# EAGLE board TSOC_PSoC4L (EAGLE 6.6.0)
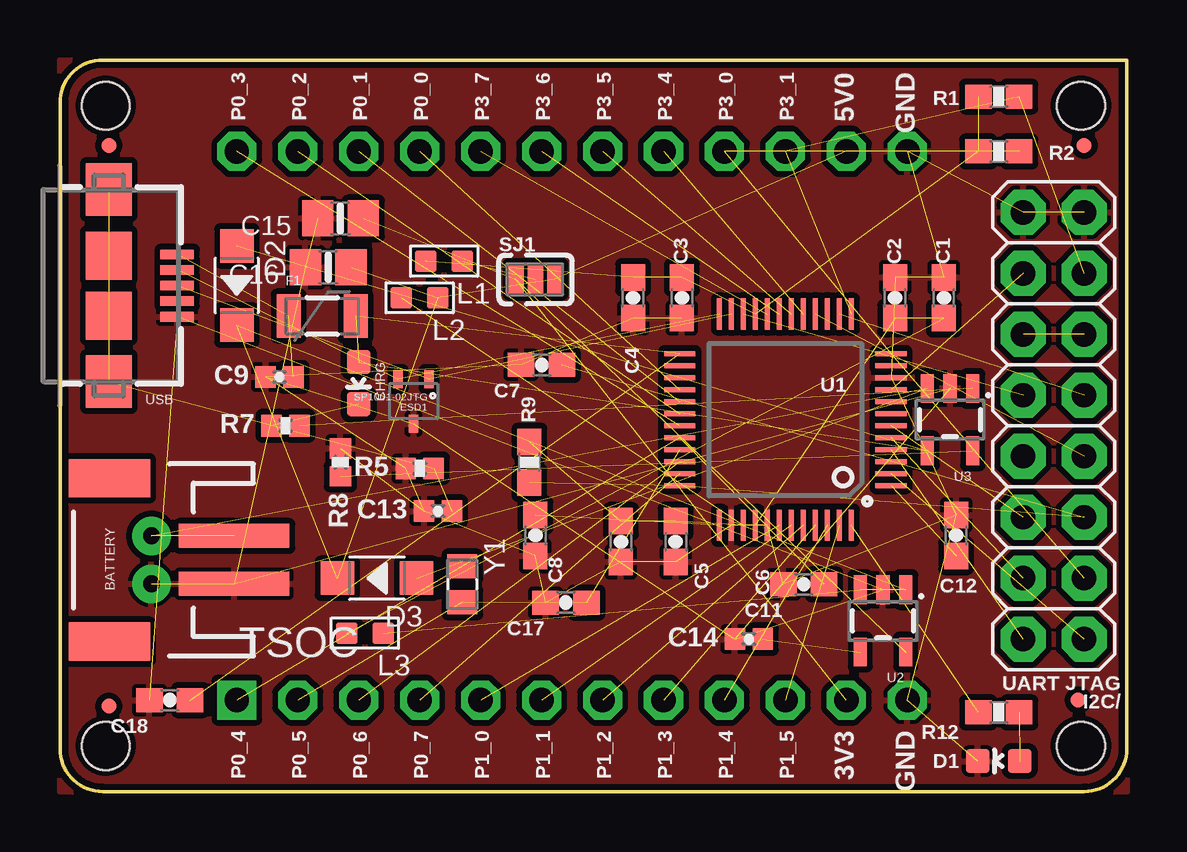
[diagram p0: board, top side]
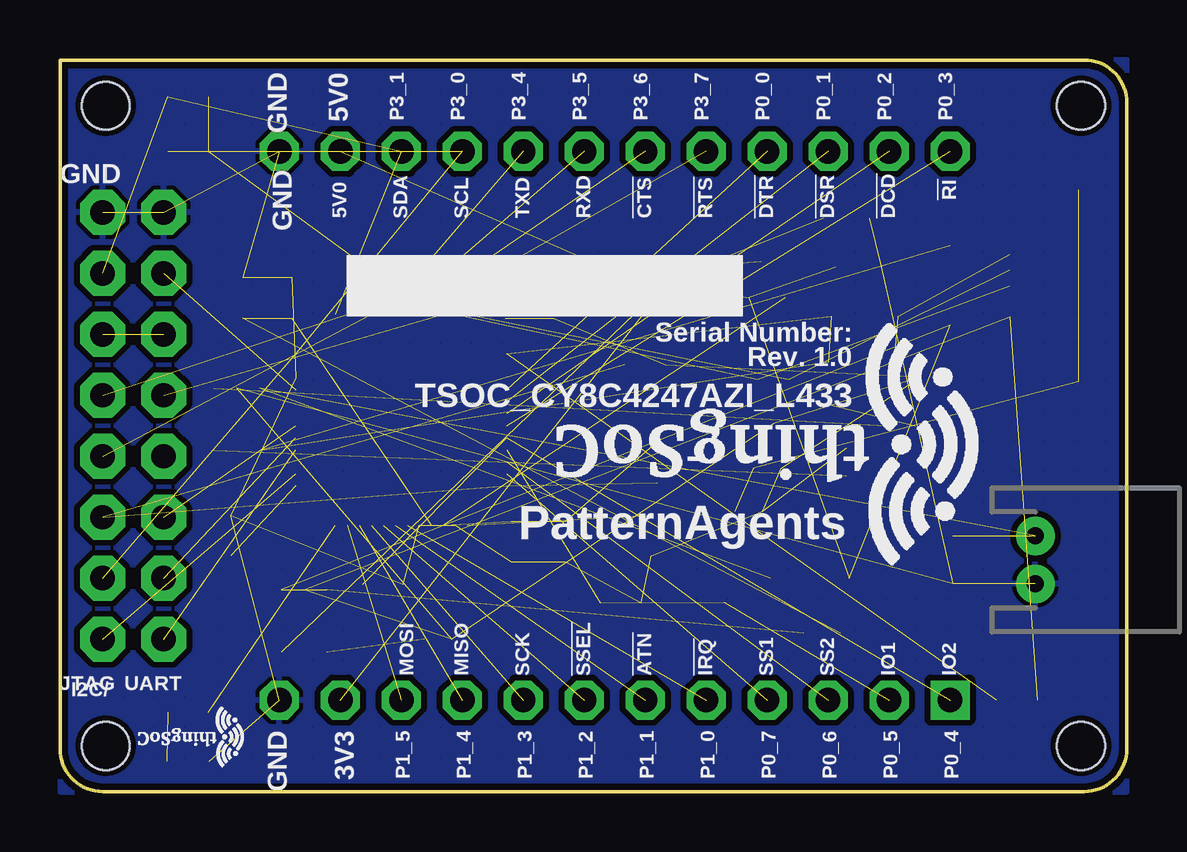
[diagram p1: board, bottom side, seen from below]

Size 44.45 x 30.48 mm. Coordinates in mm from the lower left corner, seen from the top.
Copper layers (1*16): Top 0.035mm / dielectric 1.5mm / Bottom 0.035mm
Design rules "PatternAgents_7mil": minimum track width 7mil, minimum drill 14mil, track to track 7mil, track to pad 7mil, pad to pad 7mil, via to via 7mil, smd to smd 7mil, copper to edge 7mil, drill to drill 7mil, minimum pad ring 12mil, minimum via ring 10mil, stop-mask expansion 4mil, vias tented up to drill 25mil, thermal gap 7mil
Net classes: 1 vcc: width 0.254 mm

## Footprints (pad centres in the part's own frame; a part is rotated, then mirrored left to right if it is on the bottom)
JST-2-SMD = smd 1 x 4.6: 1 -1,-3.7; 2 1,-3.7 | smd 1.6 x 3.4: NC1 -3.4,1.5; NC2 3.4,1.5
0603-CAP = smd 1.1 x 1: 1 -0.85,0; 2 0.85,0
0402-CAP = smd 0.85 x 0.9: 1 -0.58,0; 2 0.58,0
0805-NO = smd 1.3 x 1.5: 1 -0.95,0; 2 0.95,0
LED-0603 = smd 1 x 1: A 0,-0.877; C 0,0.877
SOD-123 = smd 1.397 x 1.397: + -1.651,0; - 1.651,0
SC70-3 = smd 0.4 x 0.75: 1 -0.65,-0.925; 2 0.65,-0.925; 3 0,0.925
PTC-1206 = smd 1 x 1.8: 1 -1.4,0; 2 1.4,0
MICRO-FIDUCIAL = smd 0.635 x 0.635: 1 0,0
2X8 = drill 1.016 pad 1.88 octagon: 1 0,0; 2 0,2.54; 3 2.54,0; 4 2.54,2.54; 5 5.08,0; 6 5.08,2.54; 7 7.62,0; 8 7.62,2.54; 9 10.16,0; 10 10.16,2.54; 11 12.7,0; 12 12.7,2.54; 13 15.24,0; 14 15.24,2.54; 15 17.78,0; 16 17.78,2.54
JST-2-PTH-NS = drill 0.7 pad 1.6: 1 -1,0; 2 1,0
L0603 = smd 0.889 x 0.889: 1 -0.762,0; 2 0.762,0
0603-RES = smd 1.1 x 1: 1 -0.85,0; 2 0.85,0
0402-RES = smd 0.85 x 0.9: 1 -0.58,0; 2 0.58,0
JMP-3-NC = smd 0.635 x 1.27: 1 -0.813,0; 2 0,0; 3 0.813,0
TSOC-BB-S24 = drill 1.016 square: 1B -11.43,11.43 | drill 1.016 octagon: 1C 11.43,11.43; 2B -11.43,8.89; 2C 11.43,8.89; 3B -11.43,6.35; 3C 11.43,6.35; 4B -11.43,3.81; 4C 11.43,3.81; 5B -11.43,1.27; 5C 11.43,1.27; 6B -11.43,-1.27; 6C 11.43,-1.27; 7B -11.43,-3.81; 7C 11.43,-3.81; 8B -11.43,-6.35; 8C 11.43,-6.35; 9B -11.43,-8.89; 9C 11.43,-8.89; 10B -11.43,-11.43; 10C 11.43,-11.43; 11B -11.43,-13.97; 11C 11.43,-13.97; 12B -11.43,-16.51; 12C 11.43,-16.51
TQFP-7X7-48 = smd 1.3 x 0.21: 1 -4.4,2.75; 2 -4.4,2.25; 3 -4.4,1.75; 4 -4.4,1.25; 5 -4.4,0.75; 6 -4.4,0.25; 7 -4.4,-0.25; 8 -4.4,-0.75; 9 -4.4,-1.25; 10 -4.4,-1.75; 11 -4.4,-2.25; 12 -4.4,-2.75; 25 4.4,-2.75; 26 4.4,-2.25; 27 4.4,-1.75; 28 4.4,-1.25; 29 4.4,-0.75; 30 4.4,-0.25; 31 4.4,0.25; 32 4.4,0.75; 33 4.4,1.25; 34 4.4,1.75; 35 4.4,2.25; 36 4.4,2.75 | smd 0.21 x 1.3: 13 -2.75,-4.4; 14 -2.25,-4.4; 15 -1.75,-4.4; 16 -1.25,-4.4; 17 -0.75,-4.4; 18 -0.25,-4.4; 19 0.25,-4.4; 20 0.75,-4.4; 21 1.25,-4.4; 22 1.75,-4.4; 23 2.25,-4.4; 24 2.75,-4.4; 37 2.75,4.4; 38 2.25,4.4; 39 1.75,4.4; 40 1.25,4.4; 41 0.75,4.4; 42 0.25,4.4; 43 -0.25,4.4; 44 -0.75,4.4; 45 -1.25,4.4; 46 -1.75,4.4; 47 -2.25,4.4; 48 -2.75,4.4
SOT23-5 = smd 0.55 x 1.2: 1 -0.95,-1.3; 2 0,-1.3; 3 0.95,-1.3; 4 0.95,1.3; 5 -0.95,1.3
TSOC-BB-BRD-DIM = hole 2: 13.335,16.891; -13.335,16.891; 13.335,-23.749; -13.335,-23.749
USB-AB-MICRO-SMD = smd 1.4 x 0.4: D+ 2.85,0; D- 2.85,0.65; GND 2.85,-1.3; ID 2.85,-0.65; VBUS 2.85,1.3 | smd 1.9 x 2: P$6 0,1.25; P$7 0,-1.25 | smd 1.9 x 2.2: SHIELD1 0,4; SHIELD2 0,-4
X2-SMD-L2.0X1.2X0.55MM = smd 1 x 1.25: 1 -0.75,0; 2 0.75,0

## Placement (x,y rotation side)
BATTERY  [JST-2-SMD]  3.56,9.65 90 top
C1  0.1uF  [0603-CAP]  36.83,20.57 90 top
C2  1uF  [0603-CAP]  34.8,20.57 90 top
C3  1uF  [0603-CAP]  25.91,20.57 270 top
C4  0.1uF  [0603-CAP]  23.88,20.57 270 top
C5  0.1uF  [0603-CAP]  25.65,10.41 270 top
C6  1uF  [0603-CAP]  23.37,10.41 270 top
C7  0.1uF  [0603-CAP]  20.07,17.78 180 top
C8  1uF  [0603-CAP]  19.81,10.67 270 top
C9  0.1uF  [0402-CAP]  9.14,17.27 180 top
C11  12pF  [0603-CAP]  30.99,8.64 180 top
C12  1uF  [0603-CAP]  37.34,10.67 90 top
C13  470nF  [0402-CAP]  15.75,11.68 180 top
C14  470nF  [0402-CAP]  28.7,6.35 180 top
C15  10µF  [0805-NO]  11.68,23.88 180 top
C16  10µF  [0805-NO]  11.18,21.84 180 top
C17  12pF  [0603-CAP]  21.08,7.87 180 top
C18  1uF  [0603-CAP]  4.57,3.81 180 top
CHRG  RED  [LED-0603]  12.45,17.02 180 top
D1  [LED-0603]  39.12,1.27 90 top
D2  20V-1A  [SOD-123]  7.37,21.08 270 top
D3  20V-1A  [SOD-123]  13.21,8.89 180 top
ESD1  SP1001-02JTG  [SC70-3]  14.73,16.26 180 top
F1  500mA-PTC  [PTC-1206]  10.92,19.81 0 top
FID1  FIDUCIALUFIDUCIAL  [MICRO-FIDUCIAL]  42.67,26.92 180 top
FID2  FIDUCIALUFIDUCIAL  [MICRO-FIDUCIAL]  2.03,26.92 180 top
FID3  FIDUCIALUFIDUCIAL  [MICRO-FIDUCIAL]  42.42,3.81 180 top
FID4  FIDUCIALUFIDUCIAL  [MICRO-FIDUCIAL]  2.03,3.56 180 top
J1  [2X8]  42.67,6.35 90 top
J1P  [JST-2-PTH-NS]  3.81,9.65 270 bottom
L1  330OHM-500MA  [L0603]  16,22.1 180 top
L2  330OHM-500MA  [L0603]  14.99,20.57 180 top
L3  330OHM-500MA  [L0603]  12.7,6.6 180 top
R1  2K2  [0603-RES]  39.12,28.96 180 top
R2  2K2  [0603-RES]  39.12,26.67 180 top
R5  1M  [0402-RES]  14.99,13.46 180 top
R7  1K  [0402-RES]  9.4,15.24 180 top
R8  10K  [0402-RES]  11.68,13.72 270 top
R9  10K  [0603-RES]  19.56,13.72 90 top
R12  1K  [0603-RES]  39.12,3.3 180 top
SJ1  JMP-3-NC  [JMP-3-NC]  19.81,21.34 0 top
TSOC  TSOC-24-BB  [TSOC-BB-S24]  18.8,15.24 90 top
U1  CY8C4247AZI-L433  [TQFP-7X7-48]  30.23,15.49 180 top
U2  MIC5219 3.3V  [SOT23-5]  34.29,7.11 180 top
U3  MCP73831  [SOT23-5]  37.08,15.49 180 top
U$1  TSOC-PCB-SINGLE  [TSOC-BB-BRD-DIM]  18.8,15.24 90 top
U$100  TSOC-LOGO-SMALL  [TSOC-LOGO-SML]  37.59,2.29 180 bottom
U$101  TSOC-LOGO-LRG  [TSOC-LOGO-LRG]  9.4,14.48 180 bottom
USB  USB_AB  [USB-AB-MICRO-SMD]  2.03,21.08 0 top
Y1  3.2768KHZ  [X2-SMD-L2.0X1.2X0.55MM]  16.76,8.64 270 top

## Library data of the parts
BATTERY = TSOC-ESP8266-BASE; BTM_NEG: -; BTM_POS: +; PROD_ID: CONN-11443; TOP_NEG: -; TOP_POS: +
C1-C8 C11 C12 C17 C18 R1 R2 R9 R12 = PatternAgents-Misc
C9 C13 C14 CHRG D1 ESD1 FID1-FID4 J1P R5 R7 R8 = TSOC-ESP8266-BASE
C15 C16 = microbuilder
D2 D3 = Seeed-Diode-2016; MPN: B5819W
F1 = SparkFun
J1 = PatternAgents-ProtoPads
L1-L3 = Seeed-Inductor-2016; MPN: BLM18AG121SN1D
SJ1 = PatternAgents-ProtoPads; BOM: EXCLUDE
TSOC U$1 U$100 U$101 = thingSoC
U1 = PatternAgents-Cypress
U2 = TSOC-ESP8266-BASE; PROD_ID: VREG-09872
U3 = TSOC-ESP8266-BASE; PROD_ID: IC-09995
USB = BeeSafe
Y1 = Seeed-Crystal Oscillator-2016; MPN: FC-12M

## Nets
3V3: C15.1 SJ1.1 TSOC.11B U2.5
5V0: C16.1 D2.- D3.- L2.1 L3.1 SJ1.3 TSOC.11C U2.1 U2.3
!XRES: C7.1 J1.5 R9.1 U1.36
BYPASS1: C14.1 U2.4
CLED: CHRG.C R7.2
CSTAT: R7.1 U3.1
GND: BATTERY.1 C1.2 C2.2 C3.2 C4.2 C5.2 C6.2 C7.2 C8.2 C9.2 C11.2 C12.2 C13.2 C14.2 C15.2 C16.2 C17.2 C18.2 D1.C ESD1.3 J1.15 J1.16 J1P.2 R5.2 R8.1 TSOC.12B TSOC.12C U1.10 U1.38 U1.41 U2.2 U3.2 USB.GND
N$1: R8.2 U3.5
N$17: D1.A R12.1
P0_0: TSOC.4C U1.28
P0_1: TSOC.3C U1.29
P0_2: TSOC.2C U1.30
P0_3: TSOC.1C U1.31
P0_4: C11.1 TSOC.1B U1.32 Y1.1
P0_5: C17.1 TSOC.2B U1.33 Y1.2
P0_6: TSOC.3B U1.34
P0_7: TSOC.4B U1.35
P1_0: TSOC.5B U1.42
P1_1: TSOC.6B U1.43
P1_2: TSOC.7B U1.44
P1_3: TSOC.8B U1.45
P1_4: TSOC.9B U1.46
P1_5: TSOC.10B U1.47
P1_6: R12.2 U1.48
P1_7: C12.1 U1.1
P2_0: J1.1 U1.2
P2_1: U1.3
P2_2: J1.2 U1.4
P2_3: J1.4 U1.5
P2_4: J1.6 U1.6
P2_5: U1.7
P2_6: U1.8
P2_7: J1.14 U1.9
P3_0: J1.3 R2.1 TSOC.9C U1.12
P3_1: J1.13 R1.1 TSOC.10C U1.13
P3_2: J1.9 U1.14
P3_3: J1.7 U1.16
P3_4: TSOC.8C U1.17
P3_5: TSOC.7C U1.18
P3_6: TSOC.6C U1.19
P3_7: TSOC.5C U1.20
P4_0: J1.10 U1.22
P4_1: J1.8
P7_0: U1.26
P7_1: U1.27
SJ1: L1.1 SJ1.2
USB1_DM: ESD1.2 U1.24 USB.D-
USB1_DP: ESD1.1 U1.23 USB.D+
USB1_ID: USB.ID
USB1_SHIELD: C13.1 R5.1 USB.SHIELD1 USB.SHIELD2
USB1_VBUS: C18.1 CHRG.A D2.+ F1.2 U1.25 U3.4
VBAT: BATTERY.2 D3.+ J1P.1 U3.3
VBUS1: C9.1 F1.1 USB.VBUS
VCC: J1.11 J1.12
VCCD: C8.1 U1.37
VDDA: C1.1 C2.1 L3.2 U1.40
VDDD: C5.1 C6.1 L2.2 R9.2 U1.39
VDDIO: C3.1 C4.1 L1.2 R1.2 R2.2 U1.21

## Tracks (layer width: path | path; a pad name or v marks a point on that pad's centre or on a via)
3V3  (3 unrouted)
5V0  (8 unrouted)
!XRES  (3 unrouted)
BYPASS1  (1 unrouted)
CLED  (1 unrouted)
CSTAT  (1 unrouted)
GND  (32 unrouted)
  pour Top (isolate 0.254, hatched): 44.45,30.48 44.45,0 0,0 0,30.48
  pour Bottom (isolate 0.254, hatched): 44.45,30.48 44.45,0 0,0 0,30.48
N$1  (1 unrouted)
N$17  (1 unrouted)
P0_0  (1 unrouted)
P0_1  (1 unrouted)
P0_2  (1 unrouted)
P0_3  (1 unrouted)
P0_4  (3 unrouted)
P0_5  (3 unrouted)
P0_6  (1 unrouted)
P0_7  (1 unrouted)
P1_0  (1 unrouted)
P1_1  (1 unrouted)
P1_2  (1 unrouted)
P1_3  (1 unrouted)
P1_4  (1 unrouted)
P1_5  (1 unrouted)
P1_6  (1 unrouted)
P1_7  (1 unrouted)
P2_0  (1 unrouted)
P2_2  (1 unrouted)
P2_3  (1 unrouted)
P2_4  (1 unrouted)
P2_7  (1 unrouted)
P3_0  (3 unrouted)
P3_1  (3 unrouted)
P3_2  (1 unrouted)
P3_3  (1 unrouted)
P3_4  (1 unrouted)
P3_5  (1 unrouted)
P3_6  (1 unrouted)
P3_7  (1 unrouted)
P4_0  (1 unrouted)
SJ1  (1 unrouted)
USB1_DM  (2 unrouted)
USB1_DP  (2 unrouted)
USB1_SHIELD  (3 unrouted)
USB1_VBUS  (5 unrouted)
VBAT  (3 unrouted)
VBUS1  (2 unrouted)
VCC  (1 unrouted)
VCCD  (1 unrouted)
VDDA  (3 unrouted)
VDDD  (4 unrouted)
VDDIO  (5 unrouted)

## Text on the board
tPlace: P0_3 | P0_2 | P0_1 | P0_0 | P3_7 | P3_6 | P3_5 | P3_4 | P3_0 | P3_1 | 5V0 | GND | UART | JTAG | I2C/ | P0_4 | P0_5 | P0_6 | P0_7 | P1_0 | P1_1 | P1_2 | P1_3 | P1_4 | P1_5 | 3V3 | GND
bPlace: P0_3 | P0_2 | P0_1 | P0_0 | P3_7 | P3_6 | P3_5 | P3_4 | P3_0 | P3_1 | 5V0 | GND | GND | !RI | !DCD | !DSR | !DTR | !RTS | !CTS | RXD | TXD | SCL | SDA | 5V0 | GND | Serial Number: | Rev. 1.0 | TSOC_CY8C4247AZI_L433 | PatternAgents | IO2 | IO1 | SS2 | SS1 | !IRQ | !ATN | !SSEL | SCK | MISO | MOSI | UART | JTAG | I2C/ | P0_4 | P0_5 | P0_6 | P0_7 | P1_0 | P1_1 | P1_2 | P1_3 | P1_4 | P1_5 | 3V3 | GND